# EAGLE board 7segement4digits1badidea-mk-1 (EAGLE 6.5.0)
7 Segments, 4 Digits, 0x1BAD1DEA Small 7-segment, 4 digit display breakout juuuuuust big enough for some screw holes and a 0.56" (20mm) display.
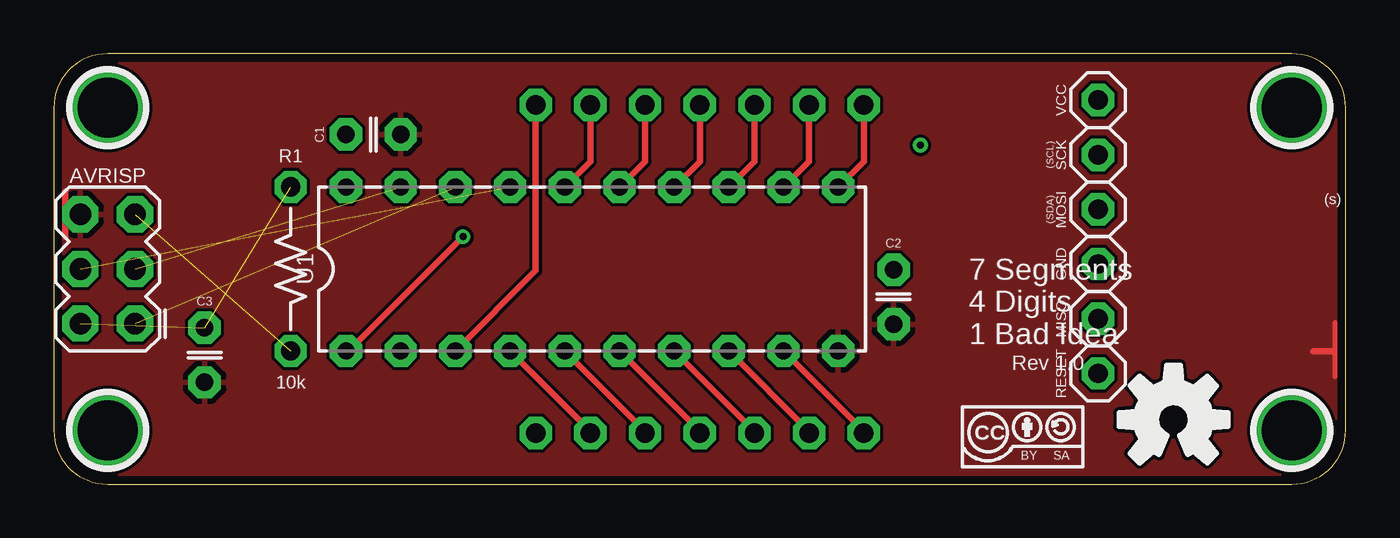
[diagram p0: board, top side]
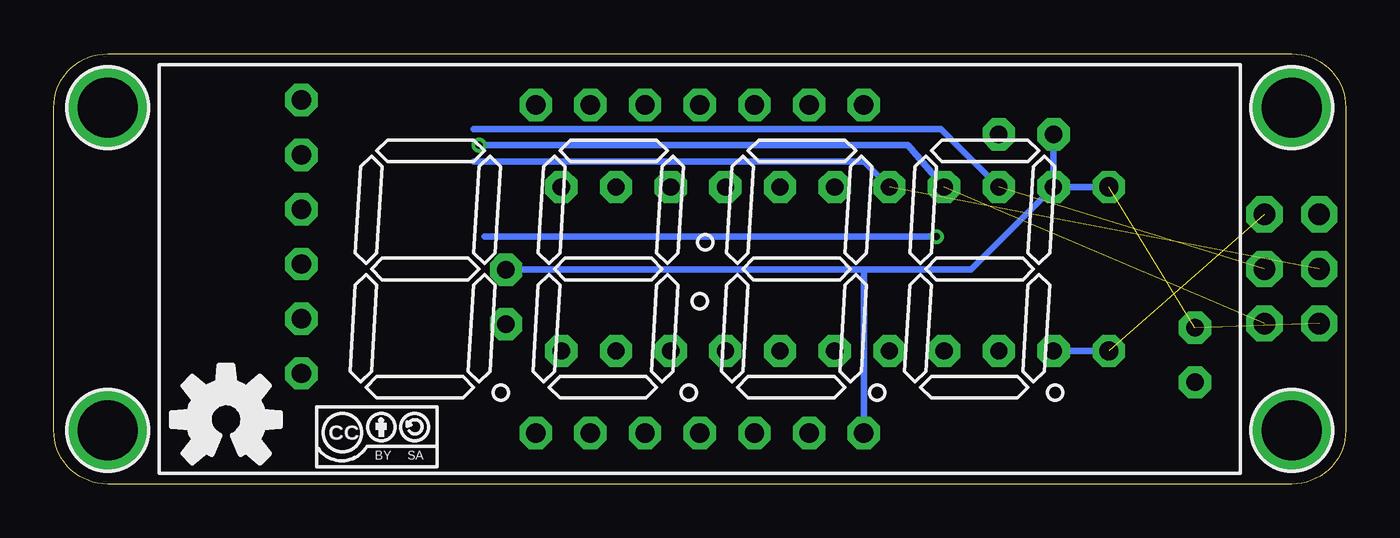
[diagram p1: board, bottom side, seen from below]

Size 60 x 20 mm. Coordinates in mm from the lower left corner, seen from the top.
Outline: 0,17.5 0,2.5 arc90 2.5,0 57.5,0 arc90 60,2.5 60,17.5 arc90 57.5,20 2.5,20 arc90 0,17.5
Copper layers (1*16): Top 0.0356mm / dielectric 1.5011mm / Bottom 0.0356mm
Design rules "LaenPCBOrder2": minimum track width 6mil, minimum drill 13mil, track to track 6mil, track to pad 6mil, pad to pad 6mil, via to via 6mil, smd to smd 6mil, copper to edge 15mil, drill to drill 6mil, minimum pad ring 7mil, minimum via ring 7mil, stop-mask expansion 3mil, vias tented up to drill 20mil, thermal gap 10mil

## Footprints (pad centres in the part's own frame; a part is rotated, then mirrored left to right if it is on the bottom)
2X3 = drill 1 pad 1.676 octagon: 1 -2.54,-1.27; 2 -2.54,1.27; 3 0,-1.27; 4 0,1.27; 5 2.54,-1.27; 6 2.54,1.27
AVR_ISP_INLINE_PTH_I2C = drill 0.9 pad 1.5 octagon: GND 1.27,0; MISO 3.81,0; MOSI -1.27,0; RESET 6.35,0; SCK -3.81,0; VCC -6.35,0
C025-024X044 = drill 0.813 pad 1.5 octagon: 1 -1.27,0; 2 1.27,0
7SEG_4DIG = drill 0.9 pad 1.5 octagon: P$1 -7.62,7.62; P$2 -5.08,7.62; P$3 -2.54,7.62; P$4 0,7.62; P$5 2.54,7.62; P$6 5.08,7.62; P$7 7.62,7.62; P$8 7.62,-7.62; P$9 5.08,-7.62; P$10 2.54,-7.62; P$11 0,-7.62; P$12 -2.54,-7.62; P$13 -5.08,-7.62; P$14 -7.62,-7.62
HOLE-#2 = drill 2.8 pad 3.81: P$1 0,0
RESISTOR-AXIAL-PTH-7.68MM = drill 0.9 pad 1.5 octagon: P$1 -3.81,0; P$2 3.81,0
DIL20 = drill 0.8 pad 1.5 octagon: 1 -11.43,-3.81; 2 -8.89,-3.81; 3 -6.35,-3.81; 4 -3.81,-3.81; 5 -1.27,-3.81; 6 1.27,-3.81; 7 3.81,-3.81; 8 6.35,-3.81; 9 8.89,-3.81; 10 11.43,-3.81; 11 11.43,3.81; 12 8.89,3.81; 13 6.35,3.81; 14 3.81,3.81; 15 1.27,3.81; 16 -1.27,3.81; 17 -3.81,3.81; 18 -6.35,3.81; 19 -8.89,3.81; 20 -11.43,3.81

## Placement (x,y rotation side)
AVRISP  AVR_SPI_PRG_6PTH  [2X3]  2.5,10 90 top
AVRISP1  AVR_SPI_PRG_6PTH_INLINE_I2C  [AVR_ISP_INLINE_PTH_I2C]  48.5,11.5 270 top
C1  0.1uF  [C025-024X044]  14.84,16.25 0 top
C2  1uF  [C025-024X044]  39,8.7 270 top
C3  10uF  [C025-024X044]  7,6 270 top
DISPLAY1  7SED_4DIGIT_14MM14.2MM-CC  [7SEG_4DIG]  30,10 0 bottom
H1  HOLE#2  [HOLE-#2]  2.5,2.5 0 top
H2  HOLE#2  [HOLE-#2]  2.5,17.5 0 top
H3  HOLE#2  [HOLE-#2]  57.5,2.5 0 top
H4  HOLE#2  [HOLE-#2]  57.5,17.5 0 top
R1  10k  [RESISTOR-AXIAL-PTH-7.68MM]  11,10 270 top
U1  ATTINY4313  [DIL20]  25,10 0 top
U$1  [OSHWLOGO_TOP_0.2_A]  52,3 0 top
U$2  [OSHWLOGO_TOP_0.2_A]  52,3 0 bottom
U$5  [CC-BY-SA-4.0-NO-URL]  45,2.2 0 top
U$6  [CC-BY-SA-4.0-NO-URL]  45,2.2 0 bottom

## Library data of the parts
AVRISP AVRISP1 C1-C3 DISPLAY1 H1-H4 R1 U1 U$1 U$2 U$5 U$6 = A_butts

## Nets
A: DISPLAY1.P$13 U1.8
B: DISPLAY1.P$9 U1.4
C: DISPLAY1.P$4 U1.14
COLON_K: DISPLAY1.P$7 U1.3
D: DISPLAY1.P$2 U1.12
DIG1: DISPLAY1.P$14 U1.9
DIG2: DISPLAY1.P$11 U1.6
DIG3: DISPLAY1.P$10 U1.5
DIG4: DISPLAY1.P$6 U1.16
DP: DISPLAY1.P$3 U1.13
E: DISPLAY1.P$1 U1.11
F: DISPLAY1.P$12 U1.7
G: DISPLAY1.P$5 U1.15
GND: AVRISP.6 C1.2 C2.2 C3.2 U1.10
MISO: AVRISP.1 U1.18
MOSI/SDA: AVRISP.4 U1.17
RESET: AVRISP.5 R1.P$2 U1.1
SCK/SCL: AVRISP.3 U1.19
VCC: AVRISP.2 C1.1 C2.1 C3.1 DISPLAY1.P$8 R1.P$1 U1.20

## Tracks (layer width: path | path; a pad name or v marks a point on that pad's centre or on a via)
A
  Top 0.305: U1.8 35.08,2.46 DISPLAY1.P$13
B
  Top 0.305: U1.4 24.92,2.46 DISPLAY1.P$9
C
  Top 0.305: U1.14 30,15 DISPLAY1.P$4
COLON_K
  Top 0.305: U1.3 22.38,9.92 DISPLAY1.P$7
D
  Top 0.305: U1.12 35.08,15 DISPLAY1.P$2
DIG1
  Top 0.305: U1.9 37.62,2.46 DISPLAY1.P$14
DIG2
  Top 0.305: U1.6 30,2.46 DISPLAY1.P$11
DIG3
  Top 0.305: U1.5 27.46,2.46 DISPLAY1.P$10
DIG4
  Top 0.305: U1.16 24.92,15 DISPLAY1.P$6
DP
  Top 0.305: U1.13 32.54,15 DISPLAY1.P$3
E
  Top 0.305: U1.11 37.62,15 DISPLAY1.P$1
F
  Top 0.305: U1.7 32.54,2.46 DISPLAY1.P$12
G
  Top 0.305: U1.15 27.46,15 DISPLAY1.P$5
GND
  Top 0.238: 59.5,7.5 59.5,5
  Top 0.305: 58.5,6.16 59.4,6.16 | 0.54,11.5 0.54,13.6 | 1.2,12.54 0.6,12.54
  pour Top: 2.5,20 57.5,20 arc-90 60,17.5 60,2.5 arc-90 57.5,0 2.5,0 arc-90 0,2.5 0,17.5 arc-90
MISO  (via drill 0.33)  (1 unrouted)
  Bottom 0.305: U1.18 20.34,15.75 v40.25,15.75
MOSI/SDA  (1 unrouted)
  Bottom 0.305: U1.17 22.38,15 40.5,15
RESET  (via drill 0.33)  (1 unrouted)
  Top 0.305: U1.1 13.69,6.19 v19,11.5
  Bottom 0.305: v19,11.5 40,11.5 | R1.P$2 U1.1
SCK/SCL  (1 unrouted)
  Bottom 0.305: U1.19 18.8,16.5 40.5,16.5
VCC  (2 unrouted)
  Bottom 0.305: R1.P$1 U1.20 | U1.20 17.41,9.97 22.38,9.97 | 22.38,9.97 C2.1 | U1.20 C1.1 | DISPLAY1.P$8 22.38,9.97

## Text on the board
tPlace: (s) | 7 Segments / 4 Digits / 1 Bad Idea | Rev 1.0